# Altium PCB Test.PcbDoc (part 5 of 9)
Units mm, origin at the board's own origin, x right, y up, seen from the top; angles counter-clockwise.
Board outline 152.4 x 101.6 mm, 2 copper layers (Top Layer, Bottom Layer); 1 components, 0 nets, 1713 pads, 1 vias.
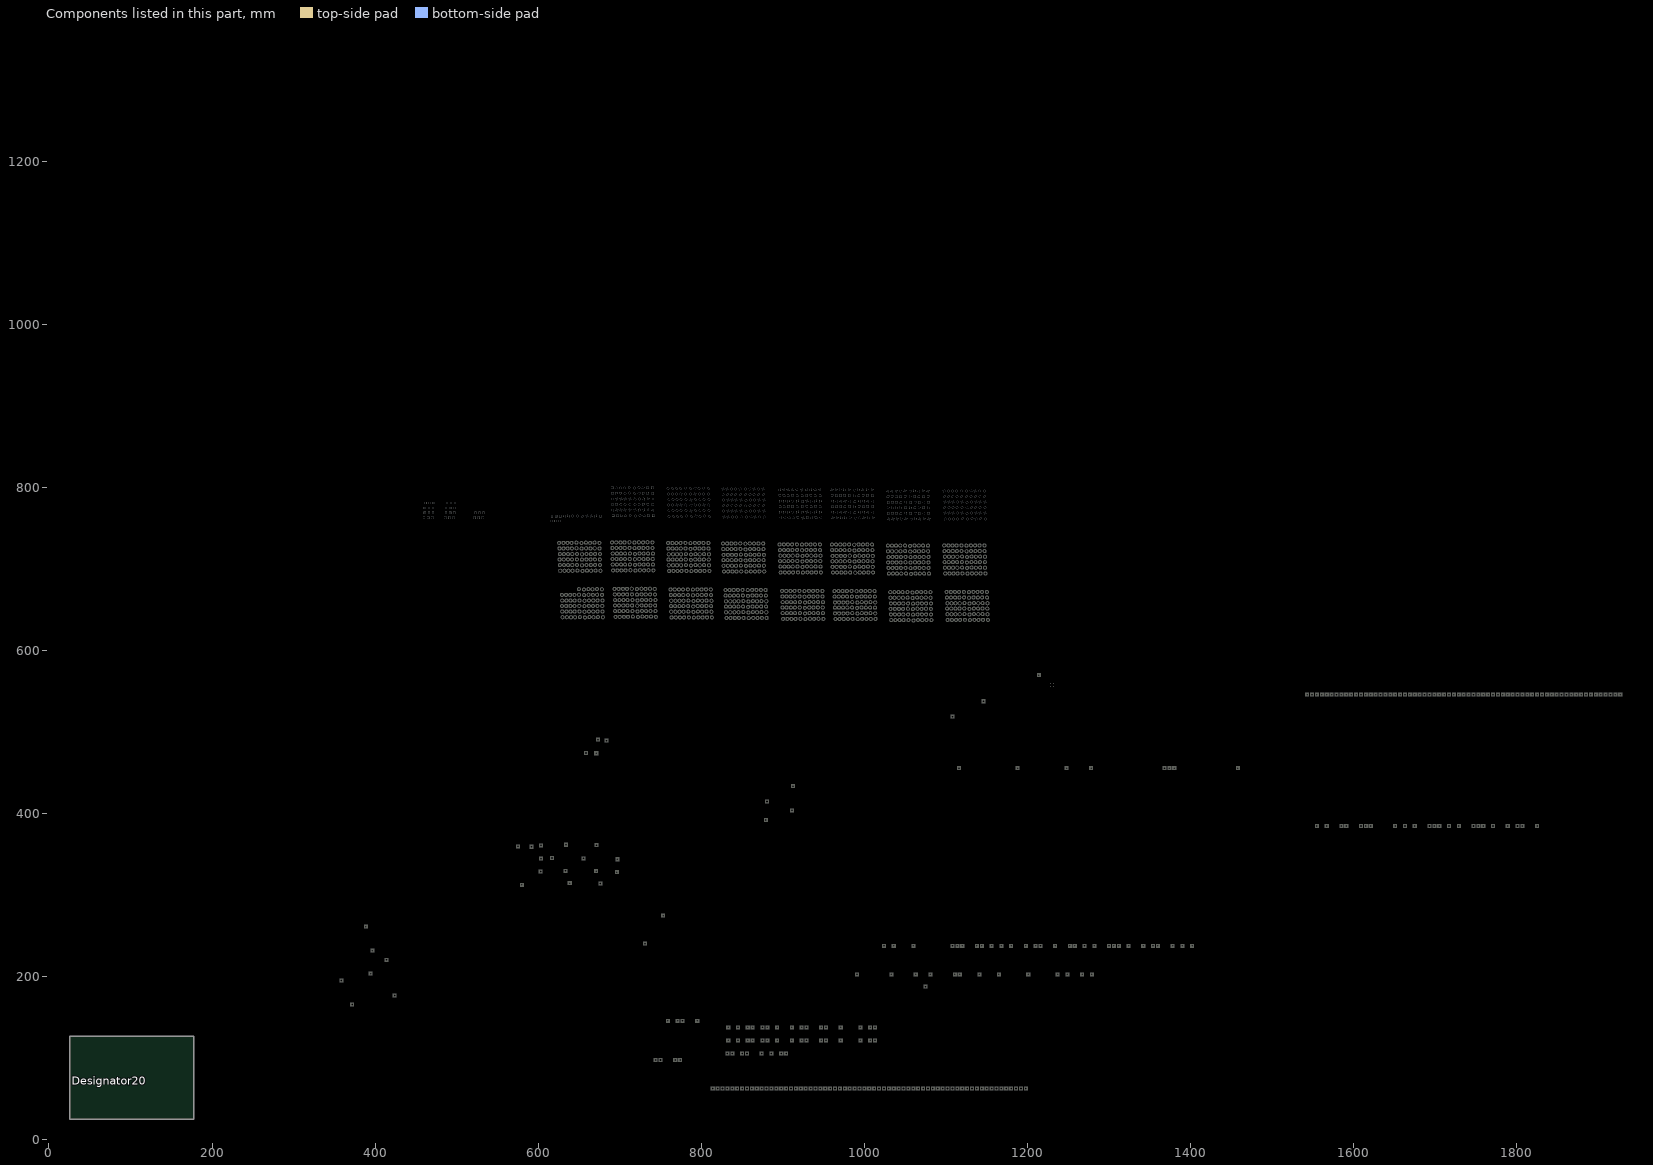
[diagram p5: the components of this part, seen from the top]

## Via types
v1: diameter 0.9, hole 0.4, Top Layer to Bottom Layer, 1 vias

## Nets (pads, with @x,y where several pads share a name; then routed paths per layer and width w, separated by ;. In a path a pad name is that pad's centre, name@x,y a point inside that pad or via, vN(x,y) a via of type N, cw(c..) or ccw(c..) an arc to the next point about the centre after c; other vN are vias at no path point) (continued)
copper on no net: (continued)
  Top Layer w0.25: 524.27,773.73 521.73,773.73 521.73,776.27 524.27,776.27 ; 525.5,773.73 525.5,776.27 ; 624.46,800.56 624.46,798.02 627,798.02 627,800.56 ; 624.569,793.538 624.878,791.017 627.399,791.326 627.09,793.847 ; 624.724,792.277 627.244,792.587 ; 625.222,784.177 625.222,786.717 627.762,786.717 627.762,784.177 ; 625.222,785.447 627.762,785.447 ; 628,676.56 ccw(c628,675.29) 628,674.02 629.46,674.02 ccw(c629.46,675.29) 629.46,676.56 630,676.56 ; 629.339,800.32 629.78,797.819 632.281,798.26 631.84,800.761 ; 629.478,793.275 630.221,790.846 632.65,791.589 631.907,794.018 ; 629.849,792.061 632.279,792.803 ; 630.321,785.227 632.823,785.667 ; 630.542,783.976 630.101,786.477 632.602,786.918 633.043,784.417 ; 630.81,799.07 630.81,799.51 ; 632.871,676.414 ccw(c633.091,675.163) 633.312,673.913 634.749,674.166 ccw(c634.529,675.417) 634.308,676.667 634.84,676.414 ; 634.262,800.049 635.131,797.662 637.518,798.531 636.649,800.918 ; 634.436,792.987 635.589,790.724 637.852,791.877 636.699,794.14 ; 635.012,791.855 637.276,793.009 ; 635.459,785.013 637.845,785.881 ; 635.89,798.856 635.89,799.724 ; 635.893,783.819 635.024,786.206 637.411,787.075 638.28,784.688 ; 639.235,799.755 640.505,797.555 642.705,798.825 641.435,801.025 ; 639.445,792.682 640.974,790.653 643.003,792.182 641.474,794.211 ; 640.21,791.668 642.238,793.196 ; 640.632,784.812 642.832,786.082 ; 640.97,798.655 640.97,799.925 ; 641.267,783.712 639.997,785.912 642.197,787.182 643.467,784.982 ; 645.023,799.573 646.656,797.628 648.601,799.261 646.968,801.206 ; 645.271,792.496 647.129,790.764 648.861,792.622 647.003,794.354 ; 646.2,791.63 647.932,793.488 ; 646.601,784.758 648.547,786.39 ; 646.812,798.601 646.812,800.233 ; 647.417,783.785 645.785,785.731 647.731,787.363 649.363,785.417 ; 651.246,798.88 653.191,797.247 654.824,799.192 652.879,800.825 ; 651.532,791.804 653.663,790.421 655.046,792.552 652.915,793.935 ; 652.597,791.113 653.981,793.243 ; 652.981,784.22 654.613,786.166 ; 653.035,798.063 653.035,800.009 ; 653.953,783.404 652.008,785.037 653.641,786.982 655.586,785.349 ; 656.761,798.952 658.961,797.682 660.231,799.882 658.031,801.152 ; 657.085,791.886 659.423,790.894 660.415,793.232 658.077,794.224 ; 658.254,791.39 659.246,793.728 ; 658.496,798.317 658.496,800.517 ; 658.623,784.474 659.893,786.674 ; 659.723,783.839 657.523,785.109 658.793,787.309 660.993,786.039 ; 662.075,798.531 664.462,797.662 665.331,800.049 662.944,800.918 ; 662.434,791.48 664.909,790.909 665.48,793.384 663.005,793.955 ; 663.671,791.195 664.243,793.669 ; 663.703,798.097 663.703,800.483 ; 664.031,784.254 664.899,786.64 ; 665.224,783.819 662.837,784.688 663.706,787.075 666.093,786.206 ; 667.566,798.387 670.067,797.946 670.508,800.447 668.007,800.888 ; 667.956,791.357 670.493,791.224 670.626,793.761 668.089,793.894 ; 669.037,798.166 669.037,800.668 ; 669.225,791.291 669.357,793.827 ; 669.578,784.323 670.02,786.825 ; 670.829,784.103 668.328,784.544 668.769,787.045 671.27,786.604 ; 673.736,798.02 676.276,798.02 676.276,800.56 673.736,800.56 ; 673.845,793.538 676.366,793.847 676.675,791.326 674.154,791.017 ; 675.006,798.02 675.006,800.56 ; 675.105,793.692 675.415,791.172 ; 675.768,784.177 675.768,786.717 ; 677.038,784.177 674.498,784.177 674.498,786.717 677.038,786.717 ; 807.46,1337.56 807.46,1335.02 810,1335.02 810,1337.56 ; 807.569,1330.538 807.878,1328.017 810.399,1328.326 810.09,1330.847 ; 807.968,1317.113 807.968,1314.573 810.508,1314.573 810.508,1317.113 ; 808.105,1263.604 ccw(c808.259,1262.343) 808.414,1261.082 809.863,1261.261 ; 808.222,1254.177 808.762,1254.177 cw(c808.762,1255.447) 808.762,1256.717 810.222,1256.717 cw(c810.222,1255.447) 810.222,1254.177 ; 808.222,1321.177 808.222,1323.717 810.762,1323.717 810.762,1321.177 ; 808.386,1310.4 808.077,1307.879 810.598,1307.57 810.907,1310.091 ; 808.508,1250.113 ccw(c808.508,1248.843) 808.508,1247.573 809.968,1247.573 ccw(c809.968,1248.843) 809.968,1250.113 810.508,1250.113 ; 808.613,1240.813 cw(c808.767,1242.074) 808.922,1243.335 ; 808.613,1240.814 810.062,1240.636 ccw(c810.217,1241.896) 810.371,1243.157 810.907,1243.334 ; 808.73,1233.73 809.27,1233.73 cw(c809.27,1235) 809.27,1236.27 810.73,1236.27 cw(c810.73,1235) 810.73,1233.73 ; 808.73,1300.73 808.73,1303.27 811.27,1303.27 811.27,1300.73 ; 808.984,1329.277 808.984,1329.587 ; 809.492,1308.83 809.492,1309.14 ; 809.863,1261.26 ccw(c809.709,1262.521) 809.554,1263.782 810.09,1263.603 ; 811,1213.56 ccw(c811,1212.29) 811,1211.02 812.46,1211.02 ccw(c812.46,1212.29) 812.46,1213.56 813,1213.56 ; 811.105,1206.604 ccw(c811.259,1205.343) 811.414,1204.082 812.863,1204.261 ccw(c812.709,1205.521) 812.554,1206.782 813.09,1206.603 ; 811.222,1197.177 811.762,1197.177 cw(c811.762,1198.447) 811.762,1199.717 813.222,1199.717 cw(c813.222,1198.447) 813.222,1197.177 ; 811.508,1193.113 ccw(c811.508,1191.843) 811.508,1190.573 812.968,1190.573 ccw(c812.968,1191.843) 812.968,1193.113 813.508,1193.113 ; 811.73,1176.73 812.27,1176.73 cw(c812.27,1178) 812.27,1179.27 813.73,1179.27 cw(c813.73,1178) 813.73,1176.73 ; 811.922,1186.335 ccw(c811.767,1185.074) 811.613,1183.813 813.062,1183.636 ccw(c813.217,1184.896) 813.371,1186.157 ; 812.339,1337.32 812.78,1334.819 815.281,1335.26 814.84,1337.761 ; 812.478,1330.275 813.221,1327.846 815.65,1328.589 814.907,1331.018 ; 812.871,1270.414 ccw(c813.091,1269.163) 813.312,1267.913 814.749,1268.166 ccw(c814.529,1269.417) 814.308,1270.667 814.84,1270.414 ; 812.995,1263.433 ccw(c813.366,1262.219) 813.737,1261.004 815.133,1261.431 ccw(c814.762,1262.645) 814.391,1263.86 814.907,1263.433 ; 813.08,1268.02 cw(c813.08,1269.29) 813.08,1270.56 ; 813.288,1317.314 812.847,1314.813 815.348,1314.372 815.789,1316.873 ; 813.371,1186.156 813.907,1186.334 ; 813.542,1254.323 814.074,1254.07 cw(c813.853,1255.32) 813.633,1256.571 815.07,1256.824 cw(c815.291,1255.574) 815.511,1254.323 ; 813.542,1320.976 813.101,1323.477 815.602,1323.918 816.043,1321.417 ; 813.609,1233.623 814.141,1233.876 cw(c814.361,1235.127) 814.582,1236.377 816.019,1236.124 cw(c815.799,1234.873) 815.578,1233.623 ; 813.609,1300.97 814.05,1303.471 816.551,1303.03 816.11,1300.529 ; 813.729,1310.571 812.986,1308.142 815.415,1307.399 816.158,1309.828 ; 813.81,1336.07 813.81,1336.51 ; 813.82,1250.22 ccw(c813.599,1248.97) 813.379,1247.719 814.816,1247.466 ccw(c815.037,1248.716) 815.257,1249.967 815.789,1250.22 ; 814.064,1329.061 814.064,1329.803 ; 814.245,1243.413 ccw(c813.874,1242.198) 813.503,1240.984 814.899,1240.557 ccw(c815.27,1241.772) 815.641,1242.986 816.158,1243.413 ; 814.318,1315.623 814.318,1316.063 ; 814.54,1268.02 ccw(c814.54,1269.29) 814.54,1270.56 ; 814.572,1308.614 814.572,1309.356 ; 814.572,1322.227 814.572,1322.667 ; 815.08,1301.78 815.08,1302.22 ; 815.871,1213.414 ccw(c816.091,1212.163) 816.312,1210.913 817.749,1211.166 ccw(c817.529,1212.417) 817.308,1213.667 817.84,1213.414 ; 815.995,1206.433 ccw(c816.366,1205.219) 816.737,1204.004 818.133,1204.431 ccw(c817.762,1205.645) 817.391,1206.86 817.907,1206.433 ; 816.542,1197.323 817.074,1197.07 cw(c816.853,1198.32) 816.633,1199.571 818.07,1199.824 cw(c818.291,1198.574) 818.511,1197.323 ; 816.609,1176.623 817.141,1176.876 cw(c817.361,1178.127) 817.582,1179.377 819.019,1179.124 cw(c818.799,1177.873) 818.578,1176.623 ; 816.82,1193.22 ccw(c816.599,1191.97) 816.379,1190.719 817.816,1190.466 ccw(c818.037,1191.716) 818.257,1192.967 818.789,1193.22 ; 817.245,1186.413 ccw(c816.874,1185.198) 816.503,1183.984 817.899,1183.557 ccw(c818.27,1184.772) 818.641,1185.986 819.158,1186.413 ; 817.262,1337.049 818.131,1334.662 820.518,1335.531 819.649,1337.918 ; 817.436,1329.987 818.589,1327.724 820.852,1328.877 819.699,1331.14 ; 817.77,1270.234 ccw(c818.204,1269.04) 818.638,1267.847 820.01,1268.346 ccw(c819.576,1269.54) 819.142,1270.733 819.649,1270.234 ; 817.917,1263.232 ccw(c818.494,1262.101) 819.07,1260.969 820.371,1261.632 ccw(c819.794,1262.763) 819.218,1263.895 819.699,1263.232 ; 818.532,1233.557 819.04,1234.056 cw(c819.474,1235.25) 819.908,1236.443 821.28,1235.944 cw(c820.846,1234.75) 820.412,1233.557 ; 818.532,1301.241 819.401,1303.628 821.788,1302.759 820.919,1300.372 ; 818.639,1317.471 817.77,1315.084 820.157,1314.215 821.026,1316.602 ; 818.89,1335.856 818.89,1336.724 ; 818.893,1254.503 819.4,1254.004 cw(c818.966,1255.197) 818.532,1256.391 819.904,1256.89 cw(c820.338,1255.697) 820.772,1254.503 ; 818.893,1320.819 818.024,1323.206 820.411,1324.075 821.28,1321.688 ; 819.097,1310.693 817.944,1308.43 820.207,1307.277 821.36,1309.54 ; 819.144,1328.855 819.144,1330.009 ; 819.146,1250.286 ccw(c818.712,1249.093) 818.278,1247.899 819.65,1247.4 ccw(c820.084,1248.593) 820.518,1249.787 821.026,1250.286 ; 819.398,1315.409 819.398,1316.277 ; 819.578,1243.448 ccw(c819.002,1242.316) 818.425,1241.185 819.726,1240.522 ccw(c820.302,1241.654) 820.879,1242.785 821.36,1243.448 ; 819.652,1308.408 819.652,1309.562 ; 819.652,1322.013 819.652,1322.881 ; 820.16,1301.566 820.16,1302.434 ; 820.77,1213.234 ccw(c821.204,1212.04) 821.638,1210.847 823.01,1211.346 ccw(c822.576,1212.54) 822.142,1213.733 822.649,1213.234 ; 820.917,1206.232 ccw(c821.494,1205.101) 822.07,1203.969 823.371,1204.632 ccw(c822.794,1205.763) 822.218,1206.895 822.699,1206.232 ; 821.532,1176.557 822.04,1177.056 cw(c822.474,1178.25) 822.908,1179.443 824.28,1178.944 cw(c823.846,1177.75) 823.412,1176.557 ; 821.893,1197.503 822.4,1197.004 cw(c821.966,1198.197) 821.532,1199.391 822.904,1199.89 cw(c823.338,1198.697) 823.772,1197.503 ; 822.146,1193.286 ccw(c821.712,1192.093) 821.278,1190.899 822.65,1190.4 ccw(c823.084,1191.593) 823.518,1192.787 824.026,1193.286 ; 822.235,1336.755 823.505,1334.555 825.705,1335.825 824.435,1338.025 ; 822.445,1329.682 823.974,1327.653 826.003,1329.182 824.474,1331.211 ; 822.578,1186.448 ccw(c822.002,1185.316) 821.425,1184.185 822.726,1183.522 ccw(c823.302,1184.654) 823.879,1185.785 824.36,1186.448 ; 822.703,1270.025 ccw(c823.338,1268.925) 823.973,1267.825 825.237,1268.555 ccw(c824.602,1269.655) 823.967,1270.755 824.435,1270.025 ; 822.877,1263.007 ccw(c823.641,1261.993) 824.405,1260.978 825.571,1261.857 ccw(c824.807,1262.871) 824.043,1263.886 ; 823.505,1233.535 823.973,1234.265 cw(c824.608,1235.365) 825.243,1236.465 826.507,1235.735 cw(c825.872,1234.635) 825.237,1233.535 ; 823.505,1301.535 824.775,1303.735 826.975,1302.465 825.705,1300.265 ; 823.97,1335.655 823.97,1336.925 ; 824.013,1317.578 822.743,1315.378 824.943,1314.108 826.213,1316.308 ; 824.043,1263.886 824.474,1263.007 ; 824.224,1328.668 824.224,1330.196 ; 824.267,1254.712 824.735,1253.982 cw(c824.1,1255.082) 823.465,1256.182 824.729,1256.912 cw(c825.364,1255.812) 825.999,1254.712 ; 824.267,1320.712 822.997,1322.912 825.197,1324.182 826.467,1321.982 ; 824.478,1315.208 824.478,1316.478 ; 824.481,1250.308 ccw(c823.846,1249.208) 823.211,1248.108 824.475,1247.378 ccw(c825.11,1248.478) 825.745,1249.578 826.213,1250.308 ; 824.482,1310.764 822.953,1308.735 824.982,1307.206 826.511,1309.235 ; 824.551,1240.531 ccw(c825.315,1241.546) 826.079,1242.56 826.511,1243.439 ; 824.551,1240.531 823.385,1241.41 cw(c824.149,1242.424) 824.913,1243.439 ; 824.732,1308.221 824.732,1309.749 ; 824.732,1321.812 824.732,1323.082 ; 825.24,1301.365 825.24,1302.635 ; 825.703,1213.025 ccw(c826.338,1211.925) 826.973,1210.825 828.237,1211.555 ccw(c827.602,1212.655) 826.967,1213.755 827.435,1213.025 ; 825.877,1206.007 ccw(c826.641,1204.993) 827.405,1203.978 828.571,1204.857 ccw(c827.807,1205.871) 827.043,1206.886 827.474,1206.007 ; 826.505,1176.535 826.973,1177.265 cw(c827.608,1178.365) 828.243,1179.465 829.507,1178.735 cw(c828.872,1177.635) 828.237,1176.535 ; 827.267,1197.712 827.735,1196.982 cw(c827.1,1198.082) 826.465,1199.182 827.729,1199.912 cw(c828.364,1198.812) 828.999,1197.712 ; 827.481,1193.308 ccw(c826.846,1192.208) 826.211,1191.108 827.475,1190.378 ccw(c828.11,1191.478) 828.745,1192.578 829.213,1193.308 ; 827.913,1186.439 ccw(c827.149,1185.424) 826.385,1184.41 827.551,1183.531 ccw(c828.315,1184.546) 829.079,1185.56 829.511,1186.439 ; 828.023,1336.573 829.656,1334.628 831.601,1336.261 829.968,1338.206 ; 828.271,1329.496 830.129,1327.764 831.861,1329.622 830.003,1331.354 ; 828.436,1269.921 ccw(c829.253,1268.948) 830.069,1267.975 831.188,1268.913 ccw(c830.371,1269.886) 829.555,1270.859 829.968,1269.921 ; 828.639,1262.891 ccw(c829.568,1262.025) 830.497,1261.159 831.493,1262.227 ccw(c830.564,1263.093) 829.635,1263.959 830.003,1262.891 ; 829.293,1233.685 829.706,1234.623 cw(c830.523,1235.596) 831.339,1236.569 ; 829.293,1301.97 830.925,1303.916 832.871,1302.284 831.239,1300.338 ; 829.812,1335.601 829.812,1337.233 ; 830.066,1328.63 830.066,1330.488 ; 830.164,1317.759 828.531,1315.814 830.476,1314.181 832.109,1316.126 ; 830.317,1257.016 cw(c831.133,1256.043) 831.95,1255.07 ; 830.317,1257.016 829.198,1256.078 ccw(c830.015,1255.105) 830.831,1254.132 830.417,1255.07 ; 830.32,1315.154 830.32,1316.786 ; 830.417,1320.785 828.785,1322.731 830.731,1324.363 832.363,1322.417 ; 830.574,1308.183 830.574,1310.041 ; 830.574,1321.758 830.574,1323.39 ; 830.577,1250.412 ccw(c829.761,1249.439) 828.944,1248.466 830.063,1247.528 ccw(c830.879,1248.501) 831.696,1249.474 ; 830.637,1310.907 828.779,1309.175 830.511,1307.317 832.369,1309.049 ; 830.825,1233.685 ccw(c831.641,1234.658) 832.458,1235.631 831.339,1236.569 ; 831.005,1243.512 ccw(c830.076,1242.646) 829.147,1241.78 830.143,1240.712 ccw(c831.072,1241.578) 832.001,1242.444 832.369,1243.512 ; 831.082,1301.311 831.082,1302.943 ; 831.436,1212.921 ccw(c832.253,1211.948) 833.069,1210.975 834.188,1211.913 ; 831.639,1205.891 ccw(c832.568,1205.025) 833.497,1204.159 834.493,1205.227 ccw(c833.564,1206.093) 832.635,1206.959 833.003,1205.891 ; 831.696,1249.474 832.109,1250.412 ; 831.944,1191.466 cw(c832.761,1192.439) 833.577,1193.412 ; 831.944,1191.466 833.063,1190.528 ccw(c833.879,1191.501) 834.696,1192.474 835.109,1193.412 ; 832.293,1176.685 832.706,1177.623 cw(c833.523,1178.596) 834.339,1179.569 835.458,1178.631 cw(c834.641,1177.658) 833.825,1176.685 ; 832.968,1212.921 832.555,1213.859 cw(c833.371,1212.886) 834.188,1211.913 ; 833.417,1198.07 833.831,1197.132 ; 833.831,1197.132 cw(c833.015,1198.105) 832.198,1199.078 833.317,1200.016 cw(c834.133,1199.043) 834.95,1198.07 ; 834.005,1186.512 ccw(c833.076,1185.646) 832.147,1184.78 833.143,1183.712 ccw(c834.072,1184.578) 835.001,1185.444 835.369,1186.512 ; 834.246,1335.88 836.191,1334.247 837.824,1336.192 835.879,1337.825 ; 834.532,1328.804 836.663,1327.421 838.046,1329.552 835.915,1330.935 ; 834.593,1269.293 ccw(c835.566,1268.477) 836.539,1267.66 837.477,1268.779 ccw(c836.504,1269.595) 835.531,1270.412 835.879,1269.293 ; 834.826,1262.257 ccw(c835.891,1261.566) 836.957,1260.874 837.752,1262.099 ccw(c836.687,1262.79) 835.621,1263.482 835.915,1262.257 ; 835.516,1233.37 835.863,1234.489 cw(c836.836,1235.305) 837.809,1236.122 838.747,1235.003 cw(c837.774,1234.187) 836.801,1233.37 ; 835.516,1301.902 837.461,1303.535 839.094,1301.59 837.149,1299.957 ; 836.035,1335.063 836.035,1337.009 ; 836.289,1328.113 836.289,1330.243 ; 836.543,1314.616 836.543,1316.562 ; 836.699,1317.378 834.754,1315.745 836.387,1313.8 838.332,1315.433 ; 836.797,1307.666 836.797,1309.796 ; 836.797,1321.22 836.797,1323.166 ; 836.953,1254.936 837.301,1253.817 cw(c836.328,1254.634) 835.355,1255.45 836.293,1256.569 cw(c837.266,1255.752) 838.239,1254.936 ; 836.953,1320.404 835.008,1322.037 836.641,1323.982 838.586,1322.349 ; 837.047,1249.965 ccw(c836.074,1249.148) 835.101,1248.332 836.039,1247.213 ccw(c837.012,1248.03) 837.985,1248.846 838.332,1249.965 ; 837.171,1310.488 835.04,1309.105 836.423,1306.974 838.554,1308.357 ; 837.305,1300.773 837.305,1302.719 ; 837.465,1243.035 ccw(c836.399,1242.343) 835.334,1241.652 836.129,1240.427 ccw(c837.195,1241.119) 838.26,1241.81 838.554,1243.035 ; 837.593,1212.293 ccw(c838.566,1211.477) 839.539,1210.66 840.477,1211.779 ccw(c839.504,1212.595) 838.531,1213.412 838.879,1212.293 ; 837.826,1205.257 ccw(c838.891,1204.566) 839.957,1203.874 840.752,1205.099 ccw(c839.687,1205.79) 838.621,1206.482 838.915,1205.257 ; 838.516,1176.37 838.863,1177.489 cw(c839.836,1178.305) 840.809,1179.122 841.747,1178.003 cw(c840.774,1177.187) 839.801,1176.37 ; 839.761,1335.952 841.961,1334.682 843.231,1336.882 841.031,1338.152 ; 839.953,1197.936 840.301,1196.817 cw(c839.328,1197.634) 838.355,1198.45 839.293,1199.569 cw(c840.266,1198.752) 841.239,1197.936 ; 840.031,1269.42 ccw(c841.131,1268.785) 842.231,1268.15 842.961,1269.414 ccw(c841.861,1270.049) 840.761,1270.684 841.031,1269.42 ; 840.047,1192.965 ccw(c839.074,1192.148) 838.101,1191.332 839.039,1190.213 ccw(c840.012,1191.03) 840.985,1191.846 841.332,1192.965 ; 840.085,1328.886 842.423,1327.894 843.415,1330.232 841.077,1331.224 ; 840.296,1262.383 ccw(c841.465,1261.887) 842.634,1261.391 843.204,1262.735 ccw(c842.035,1263.231) 840.866,1263.727 841.077,1262.383 ; 840.465,1186.035 ccw(c839.399,1185.343) 838.334,1184.652 839.129,1183.427 ccw(c840.195,1184.119) 841.26,1184.81 841.554,1186.035 ; 841.031,1233.86 841.301,1235.124 cw(c842.401,1235.759) 843.501,1236.394 844.231,1235.13 cw(c843.131,1234.495) 842.031,1233.86 ; 841.031,1302.592 843.231,1303.862 844.501,1301.662 842.301,1300.392 ; 841.496,1335.317 841.496,1337.517 ; 841.75,1328.39 841.75,1330.728 ; 842.004,1314.87 842.004,1317.07 ; 842.258,1307.943 842.258,1310.281 ; 842.258,1321.474 842.258,1323.674 ; 842.469,1317.705 840.269,1316.435 841.539,1314.235 843.739,1315.505 ; 842.723,1255.571 842.993,1254.307 cw(c841.893,1254.942) 840.793,1255.577 841.523,1256.841 cw(c842.623,1256.206) 843.723,1255.571 ; 842.723,1320.839 840.523,1322.109 841.793,1324.309 843.993,1323.039 ; 842.739,1250.237 ccw(c841.639,1249.602) 840.539,1248.967 841.269,1247.703 ccw(c842.369,1248.338) 843.469,1248.973 843.739,1250.237 ; 842.766,1301.027 842.766,1303.227 ; 842.931,1310.777 840.593,1309.785 841.585,1307.447 843.923,1308.439 ; 843.031,1212.42 ccw(c844.131,1211.785) 845.231,1211.15 845.961,1212.414 ccw(c844.861,1213.049) 843.761,1213.684 844.031,1212.42 ; 843.142,1243.28 ccw(c841.973,1242.784) 840.804,1242.288 841.374,1240.944 ccw(c842.543,1241.44) 843.712,1241.936 843.923,1243.28 ; 843.296,1205.383 ccw(c844.465,1204.887) 845.634,1204.391 846.204,1205.735 ccw(c845.035,1206.231) 843.866,1206.727 844.077,1205.383 ; 844.031,1176.86 844.301,1178.124 cw(c845.401,1178.759) 846.501,1179.394 847.231,1178.13 cw(c846.131,1177.495) 845.031,1176.86 ; 845.075,1335.531 847.462,1334.662 848.331,1337.049 845.944,1337.918 ; 845.26,1269.038 ccw(c846.453,1268.604) 847.647,1268.17 848.146,1269.542 ccw(c846.953,1269.976) 845.759,1270.41 845.944,1269.038 ; 845.434,1328.48 847.909,1327.909 848.48,1330.384 846.005,1330.955 ; 845.555,1262.006 ccw(c846.793,1261.721) 848.03,1261.435 848.359,1262.858 ccw(c847.121,1263.143) 845.884,1263.429 846.005,1262.006 ; 845.723,1198.571 845.993,1197.307 cw(c844.893,1197.942) 843.793,1198.577 844.523,1199.841 cw(c845.623,1199.206) 846.723,1198.571 ; 845.739,1193.237 ccw(c844.639,1192.602) 843.539,1191.967 844.269,1190.703 ccw(c845.369,1191.338) 846.469,1191.973 846.739,1193.237 ; 846.142,1186.28 ccw(c844.973,1185.784) 843.804,1185.288 844.374,1183.944 ccw(c845.543,1184.44) 846.712,1184.936 846.923,1186.28 ; 846.345,1233.88 846.53,1235.252 cw(c847.723,1235.686) 848.917,1236.12 849.416,1234.748 cw(c848.223,1234.314) 847.029,1233.88 ; 846.345,1302.759 848.732,1303.628 849.601,1301.241 847.214,1300.372 ; 846.703,1335.097 846.703,1337.483 ; 846.957,1328.195 846.957,1330.669 ; 847.211,1314.65 847.211,1317.036 ; 847.465,1307.748 847.465,1310.222 ; 847.465,1321.254 847.465,1323.64 ; 847.97,1317.471 845.583,1316.602 846.452,1314.215 848.839,1315.084 ; 847.973,1300.807 847.973,1303.193 ; 848.155,1249.963 ccw(c846.961,1249.529) 845.768,1249.095 846.267,1247.723 ccw(c847.461,1248.157) 848.654,1248.591 848.839,1249.963 ; 848.224,1255.699 848.409,1254.327 cw(c847.215,1254.761) 846.022,1255.195 846.521,1256.567 cw(c847.715,1256.133) 848.908,1255.699 ; 848.224,1320.819 845.837,1321.688 846.706,1324.075 849.093,1323.206 ; 848.26,1212.038 ccw(c849.453,1211.604) 850.647,1211.17 851.146,1212.542 ccw(c849.953,1212.976) 848.759,1213.41 848.944,1212.038 ; 848.417,1310.508 845.942,1309.937 846.513,1307.462 848.988,1308.033 ; 848.538,1242.982 ccw(c847.301,1242.696) 846.063,1242.411 846.392,1240.988 ccw(c847.629,1241.274) 848.867,1241.559 848.988,1242.982 ; 848.555,1205.006 ccw(c849.793,1204.721) 851.03,1204.435 851.359,1205.858 ccw(c850.121,1206.143) 848.884,1206.429 849.005,1205.006 ; 849.345,1176.88 849.53,1178.252 cw(c850.723,1178.686) 851.917,1179.12 852.416,1177.748 cw(c851.223,1177.314) 850.029,1176.88 ; 850.566,1335.387 853.067,1334.946 853.508,1337.447 851.007,1337.888 ; 850.659,1268.919 ccw(c851.91,1268.698) 853.161,1268.478 853.414,1269.915 ccw(c852.164,1270.136) 850.913,1270.356 851.007,1268.919 ; 850.956,1328.357 853.493,1328.224 853.626,1330.761 851.089,1330.894 ; 850.985,1261.896 ccw(c852.253,1261.83) 853.521,1261.764 853.597,1263.222 ccw(c852.329,1263.288) 851.061,1263.354 851.089,1261.896 ; 851.155,1192.963 ccw(c849.961,1192.529) 848.768,1192.095 849.267,1190.723 ccw(c850.461,1191.157) 851.654,1191.591 851.839,1192.963 ; 851.224,1198.699 851.409,1197.327 cw(c850.215,1197.761) 849.022,1198.195 849.521,1199.567 cw(c850.715,1199.133) 851.908,1198.699 ; 851.538,1185.982 ccw(c850.301,1185.696) 849.063,1185.411 849.392,1183.988 ccw(c850.629,1184.274) 851.867,1184.559 851.988,1185.982 ; 851.836,1234.187 851.93,1235.625 cw(c853.18,1235.846) 854.431,1236.066 854.684,1234.629 cw(c853.434,1234.408) 852.183,1234.188 ; 851.836,1303.157 854.337,1303.598 854.778,1301.097 852.277,1300.656 ; 852.037,1335.166 852.037,1337.668 ; 852.291,1328.291 852.291,1330.827 ; 852.545,1314.719 852.545,1317.221 ; 852.799,1307.844 852.799,1310.38 ; 852.799,1321.323 852.799,1323.825 ; 853.307,1300.876 853.307,1303.378 ; 853.575,1317.441 851.074,1317 851.515,1314.499 854.016,1314.94 ; 853.659,1211.919 ccw(c854.91,1211.698) 856.161,1211.478 856.414,1212.915 ccw(c855.164,1213.136) 853.913,1213.356 854.007,1211.919 ; 853.669,1249.909 ccw(c852.418,1249.689) 851.167,1249.468 851.421,1248.03 ccw(c852.672,1248.251) 853.923,1248.472 854.016,1249.91 ; 853.829,1256.072 853.923,1254.634 cw(c852.672,1254.855) 851.421,1255.076 851.675,1256.514 cw(c852.926,1256.293) 854.177,1256.072 ; 853.829,1321.103 851.328,1321.544 851.769,1324.045 854.27,1323.604 ; 853.985,1204.896 ccw(c855.253,1204.83) 856.521,1204.764 856.597,1206.222 ccw(c855.329,1206.288) 854.061,1206.354 854.089,1204.896 ; 854.001,1310.447 851.464,1310.314 851.597,1307.777 854.134,1307.91 ; 854.029,1242.907 ccw(c852.761,1242.841) 851.493,1242.775 851.569,1241.317 ccw(c852.837,1241.383) 854.105,1241.449 854.134,1242.907 ; 854.836,1177.187 854.93,1178.625 cw(c856.18,1178.846) 857.431,1179.066 857.684,1177.629 cw(c856.434,1177.408) 855.183,1177.188 ; 856.669,1192.909 ccw(c855.418,1192.689) 854.167,1192.468 854.421,1191.03 ccw(c855.672,1191.251) 856.923,1191.472 857.016,1192.91 ; 856.736,1335.02 859.276,1335.02 859.276,1337.56 856.736,1337.56 ; 856.829,1199.072 856.923,1197.634 cw(c855.672,1197.855) 854.421,1198.076 854.675,1199.514 cw(c855.926,1199.293) 857.177,1199.072 ; 856.845,1261.553 856.911,1263.002 cw(c858.171,1263.157) 859.432,1263.311 859.609,1261.862 cw(c858.349,1261.707) 857.088,1261.553 ; 856.845,1330.538 859.366,1330.847 859.675,1328.326 857.154,1328.017 ; 857.029,1185.907 ccw(c855.761,1185.841) 854.493,1185.775 854.569,1184.317 ccw(c855.837,1184.383) 857.105,1184.449 857.134,1185.907 ; 858.006,1300.73 860.546,1300.73 860.546,1303.27 858.006,1303.27 ; 858.006,1335.02 858.006,1337.56 ; 858.26,1328.172 858.26,1330.692 ; 858.514,1314.573 858.514,1317.113 ; 858.768,1307.725 858.768,1310.245 ; 858.768,1321.177 858.768,1323.717 ; 859.276,1300.73 859.276,1303.27 ; 859.784,1314.573 857.244,1314.573 857.244,1317.113 859.784,1317.113 ; 859.845,1204.553 859.911,1206.002 cw(c861.171,1206.157) 862.432,1206.311 862.609,1204.862 cw(c861.349,1204.707) 860.088,1204.553 ; 859.874,1242.555 859.939,1241.106 cw(c858.679,1241.26) 857.418,1241.415 857.597,1242.864 cw(c858.857,1242.71) 860.118,1242.555 ; 859.874,1307.57 857.353,1307.879 857.662,1310.4 860.183,1310.091 ; 860.038,1321.177 857.498,1321.177 857.498,1323.717 860.038,1323.717 ; 862.874,1185.555 862.939,1184.106 cw(c861.679,1184.26) 860.418,1184.415 860.597,1185.864 cw(c861.857,1185.71) 863.118,1185.555 ; 872.342,1330.865 872.956,1328.401 875.42,1329.015 874.806,1331.479 ; 872.357,1338.068 872.357,1335.528 874.897,1335.528 874.897,1338.068 ; 872.865,1317.621 872.865,1315.081 875.405,1315.081 875.405,1317.621 ; 872.865,1263.996 ccw(c873.173,1262.763) 873.48,1261.531 874.897,1261.884 ccw(c874.589,1263.117) 874.282,1264.349 874.806,1263.996 ; 872.897,1271.068 ccw(c872.897,1269.798) 872.897,1268.528 874.357,1268.528 ccw(c874.357,1269.798) 874.357,1271.068 874.897,1271.068 ; 873.119,1324.225 873.119,1321.685 875.659,1321.685 875.659,1324.225 ; 873.405,1250.621 ccw(c873.405,1249.351) 873.405,1248.081 874.865,1248.081 ccw(c874.865,1249.351) 874.865,1250.621 875.405,1250.621 ; 873.464,1311.032 872.85,1308.568 875.314,1307.954 875.928,1310.418 ; 873.627,1303.778 873.627,1301.238 876.167,1301.238 876.167,1303.778 ; 873.659,1257.225 ccw(c873.659,1255.955) 873.659,1254.685 875.119,1254.685 ccw(c875.119,1255.955) 875.119,1257.225 875.659,1257.225 ; 873.881,1329.633 873.881,1330.247 ; 873.988,1243.902 ccw(c873.681,1242.67) 873.373,1241.437 874.79,1241.084 ccw(c875.097,1242.316) 875.405,1243.549 875.928,1243.902 ; 874.167,1236.778 ccw(c874.167,1235.508) 874.167,1234.238 875.627,1234.238 ccw(c875.627,1235.508) 875.627,1236.778 876.167,1236.778 ; 874.389,1309.186 874.389,1309.8 ; 875.865,1206.996 ccw(c876.173,1205.763) 876.48,1204.531 877.897,1204.884 ccw(c877.589,1206.117) 877.282,1207.349 877.806,1206.996 ; 875.897,1214.068 ccw(c875.897,1212.798) 875.897,1211.528 877.357,1211.528 ccw(c877.357,1212.798) 877.357,1214.068 877.897,1214.068 ; 876.405,1193.621 ccw(c876.405,1192.351) 876.405,1191.081 877.865,1191.081 ccw(c877.865,1192.351) 877.865,1193.621 878.405,1193.621 ; 876.659,1200.225 ccw(c876.659,1198.955) 876.659,1197.685 878.119,1197.685 ccw(c878.119,1198.955) 878.119,1200.225 878.659,1200.225 ; 876.988,1186.902 ccw(c876.681,1185.67) 876.373,1184.437 877.79,1184.084 ccw(c878.097,1185.316) 878.405,1186.549 878.928,1186.902 ; 877.079,1337.557 877.948,1335.17 880.335,1336.039 879.466,1338.426 ; 877.167,1179.778 ccw(c877.167,1178.508) 877.167,1177.238 878.627,1177.238 ccw(c878.627,1178.508) 878.627,1179.778 879.167,1179.778 ; 877.198,1330.283 878.618,1328.177 880.724,1329.597 879.304,1331.703 ; 877.587,1270.742 ccw(c878.021,1269.548) 878.455,1268.355 879.827,1268.854 ccw(c879.393,1270.048) 878.959,1271.241 879.466,1270.742 ; 877.646,1263.585 ccw(c878.356,1262.532) 879.066,1261.479 ; 877.841,1323.714 878.71,1321.327 881.097,1322.196 880.228,1324.583 ; 878.349,1256.899 ccw(c878.783,1255.705) 879.217,1254.512 880.589,1255.011 ccw(c880.155,1256.205) 879.721,1257.398 880.228,1256.899 ; 878.456,1317.979 877.587,1315.592 879.974,1314.723 880.843,1317.11 ; 878.707,1336.364 878.707,1337.232 ; 878.961,1329.23 878.961,1330.65 ; 878.963,1250.794 ccw(c878.529,1249.601) 878.095,1248.407 879.467,1247.908 ccw(c879.901,1249.101) 880.335,1250.295 880.843,1250.794 ; 879.066,1261.479 880.276,1262.295 ccw(c879.566,1263.348) 878.856,1264.401 879.304,1263.585 ; 879.126,1311.256 877.706,1309.15 879.812,1307.73 881.232,1309.836 ; 879.215,1315.917 879.215,1316.785 ; 879.218,1304.136 878.349,1301.749 880.736,1300.88 881.605,1303.267 ; 879.364,1241.032 ccw(c880.074,1242.085) 880.784,1243.138 881.232,1243.954 ; 879.364,1241.032 878.154,1241.848 cw(c878.864,1242.901) 879.574,1243.954 ; 879.469,1308.783 879.469,1310.203 ; 879.469,1322.521 879.469,1323.389 ; 879.725,1236.951 ccw(c879.291,1235.758) 878.857,1234.564 880.229,1234.065 ccw(c880.663,1235.258) 881.097,1236.452 881.605,1236.951 ; 879.977,1302.074 879.977,1302.942 ; 880.587,1213.742 ccw(c881.021,1212.548) 881.455,1211.355 882.827,1211.854 ccw(c882.393,1213.048) 881.959,1214.241 882.466,1213.742 ; 880.646,1206.585 ccw(c881.356,1205.532) 882.066,1204.479 883.276,1205.295 ccw(c882.566,1206.348) 881.856,1207.401 ; 881.349,1199.899 ccw(c881.783,1198.705) 882.217,1197.512 883.589,1198.011 ccw(c883.155,1199.205) 882.721,1200.398 883.228,1199.899 ; 881.856,1207.401 882.304,1206.585 ; 881.963,1193.794 ccw(c881.529,1192.601) 881.095,1191.407 882.467,1190.908 ccw(c882.901,1192.101) 883.335,1193.295 883.843,1193.794 ; 881.998,1336.954 883.631,1335.009 885.576,1336.642 883.943,1338.587 ; 882.267,1329.659 884.322,1328.166 885.815,1330.221 883.76,1331.714 ; 882.411,1270.302 ccw(c883.228,1269.329) 884.044,1268.356 885.163,1269.294 ccw(c884.346,1270.267) 883.53,1271.24 883.943,1270.302 ; 882.574,1186.954 ccw(c881.864,1185.901) 881.154,1184.848 882.364,1184.032 ccw(c883.074,1185.085) 883.784,1186.138 884.232,1186.954 ; 882.584,1263.096 ccw(c883.612,1262.349) 884.639,1261.603 885.498,1262.784 ccw(c884.47,1263.531) 883.443,1264.277 883.76,1263.096 ; 882.725,1179.951 ccw(c882.291,1178.758) 881.857,1177.564 883.229,1177.065 ccw(c883.663,1178.258) 884.097,1179.452 884.605,1179.951 ; 883.787,1335.982 883.787,1337.614 ; 883.79,1324.583 882.921,1322.196 885.308,1321.327 886.177,1323.714 ; 884.041,1328.913 884.041,1330.967 ; 884.139,1318.14 882.506,1316.195 884.451,1314.562 886.084,1316.507 ; 884.295,1315.535 884.295,1317.167 ; 884.297,1257.398 ccw(c883.863,1256.205) 883.429,1255.011 884.801,1254.512 ccw(c885.235,1255.705) 885.669,1256.899 ; 884.549,1308.466 884.549,1310.52 ; 884.549,1322.521 884.549,1323.389 ; 884.552,1250.793 ccw(c883.736,1249.82) 882.919,1248.847 884.038,1247.909 ccw(c884.854,1248.882) 885.671,1249.855 ; 884.83,1311.267 882.775,1309.774 884.268,1307.719 886.323,1309.212 ; 884.9,1304.297 883.268,1302.351 885.214,1300.719 886.846,1302.665 ; 885.057,1301.692 885.057,1303.324 ; 885.147,1243.83 ccw(c884.12,1243.084) 883.092,1242.337 883.951,1241.156 ccw(c884.978,1241.902) 886.006,1242.649 886.323,1243.83 ; 885.314,1236.95 ccw(c884.498,1235.977) 883.681,1235.004 884.8,1234.066 ccw(c885.616,1235.039) 886.433,1236.012 886.846,1236.95 ; 885.411,1213.302 ccw(c886.228,1212.329) 887.044,1211.356 888.163,1212.294 ; 885.584,1206.096 ccw(c886.612,1205.349) 887.639,1204.603 888.498,1205.784 ccw(c887.47,1206.531) 886.443,1207.277 886.76,1206.096 ; 885.671,1249.855 886.084,1250.793 ; 885.669,1256.899 886.177,1257.398 ; 885.919,1191.847 cw(c886.736,1192.82) 887.552,1193.793 ; 885.919,1191.847 887.038,1190.909 ccw(c887.854,1191.882) 888.671,1192.855 889.084,1193.793 ; 886.943,1213.302 886.53,1214.24 cw(c887.346,1213.267) 888.163,1212.294 ; 887.132,1336.333 889.332,1335.063 890.602,1337.263 888.402,1338.533 ; 887.297,1200.398 ccw(c886.863,1199.205) 886.429,1198.011 887.801,1197.512 ccw(c888.235,1198.705) 888.669,1199.899 889.177,1200.398 ; 887.402,1269.801 ccw(c888.502,1269.166) 889.602,1268.531 890.332,1269.795 ccw(c889.232,1270.43) 888.132,1271.065 888.402,1269.801 ; 887.55,1329.069 889.992,1328.369 890.692,1330.811 888.25,1331.511 ; 887.699,1262.588 ccw(c888.92,1262.238) 890.141,1261.888 890.543,1263.292 ccw(c889.322,1263.642) 888.101,1263.992 888.25,1262.588 ; 887.8,1177.066 886.681,1178.004 cw(c887.498,1178.977) 888.314,1179.95 ; 887.8,1177.066 ccw(c888.616,1178.039) 889.433,1179.012 889.846,1179.95 ; 887.894,1322.49 890.094,1321.22 891.364,1323.42 889.164,1324.69 ; 888.147,1186.83 ccw(c887.12,1186.084) 886.092,1185.337 886.951,1184.156 ccw(c887.978,1184.902) 889.006,1185.649 889.323,1186.83 ; 888.164,1255.958 ccw(c889.264,1255.323) 890.364,1254.688 891.094,1255.952 ccw(c889.994,1256.587) 888.894,1257.222 889.164,1255.958 ; 888.867,1335.698 888.867,1337.898 ; 889.121,1328.719 889.121,1331.161 ; 889.375,1315.251 889.375,1317.451 ; 889.629,1308.272 889.629,1310.714 ; 889.629,1321.855 889.629,1324.055 ; 889.84,1318.086 887.64,1316.816 888.91,1314.616 891.11,1315.886 ; 890.11,1250.618 ccw(c889.01,1249.983) 887.91,1249.348 888.64,1248.084 ccw(c889.74,1248.719) 890.84,1249.354 891.11,1250.618 ; 890.137,1301.408 890.137,1303.608 ; 890.402,1212.801 ccw(c891.502,1212.166) 892.602,1211.531 893.332,1212.795 ccw(c892.232,1213.43) 891.132,1214.065 891.402,1212.801 ; 890.5,1311.064 888.058,1310.364 888.758,1307.922 891.2,1308.622 ; 890.602,1304.243 888.402,1302.973 889.672,1300.773 891.872,1302.043 ; 890.649,1243.545 ccw(c889.428,1243.195) 888.207,1242.845 888.609,1241.441 ccw(c889.83,1241.791) 891.051,1242.141 891.2,1243.545 ; 890.699,1205.588 ccw(c891.92,1205.238) 893.141,1204.888 893.543,1206.292 ccw(c892.322,1206.642) 891.101,1206.992 891.25,1205.588 ; 890.872,1236.775 ccw(c889.772,1236.14) 888.672,1235.505 889.402,1234.241 ccw(c890.502,1234.876) 891.602,1235.511 891.872,1236.775 ; 891.164,1198.958 ccw(c892.264,1198.323) 893.364,1197.688 894.094,1198.952 ccw(c892.994,1199.587) 891.894,1200.222 892.164,1198.958 ; 893.11,1193.618 ccw(c892.01,1192.983) 890.91,1192.348 891.64,1191.084 ccw(c892.74,1191.719) 893.84,1192.354 894.11,1193.618 ; 893.238,1335.895 895.739,1335.454 896.18,1337.955 893.679,1338.396 ; 893.331,1269.427 ccw(c894.582,1269.206) 895.833,1268.986 896.086,1270.423 ccw(c894.836,1270.644) 893.585,1270.864 893.679,1269.427 ; 893.607,1262.25 893.645,1263.707 cw(c894.912,1263.795) 896.179,1263.884 896.281,1262.427 cw(c895.014,1262.339) 893.747,1262.25 ; 893.607,1331.245 896.141,1331.423 896.319,1328.889 893.785,1328.711 ; 893.649,1186.545 ccw(c892.428,1186.195) 891.207,1185.845 891.609,1184.441 ccw(c892.83,1184.791) 894.051,1185.141 894.2,1186.545 ; 893.872,1179.775 ccw(c892.772,1179.14) 891.672,1178.505 892.402,1177.241 ccw(c893.502,1177.876) 894.602,1178.511 894.872,1179.775 ; 894,1322.052 896.501,1321.611 896.942,1324.112 894.441,1324.553 ; 894.093,1255.584 ccw(c895.344,1255.363) 896.595,1255.143 896.848,1256.58 ccw(c895.598,1256.801) 894.347,1257.021 894.441,1255.584 ; 894.709,1335.674 894.709,1338.176 ; 894.963,1328.8 894.963,1331.334 ; 895.217,1315.227 895.217,1317.729 ; 895.471,1308.353 895.471,1310.887 ; 895.471,1321.831 895.471,1324.333 ; 895.979,1301.384 895.979,1303.886 ; 896.247,1317.949 893.746,1317.508 894.187,1315.007 896.688,1315.448 ; 896.331,1212.427 ccw(c897.582,1212.206) 898.833,1211.986 899.086,1213.423 ccw(c897.836,1213.644) 896.585,1213.864 896.679,1212.427 ; 896.341,1250.417 ccw(c895.09,1250.197) 893.839,1249.976 894.093,1248.538 ccw(c895.344,1248.759) 896.595,1248.98 896.688,1250.418 ; 896.607,1205.25 896.645,1206.707 cw(c897.912,1206.795) 899.179,1206.884 899.281,1205.427 cw(c898.014,1205.339) 896.747,1205.25 ; 896.649,1243.26 896.687,1241.803 cw(c895.42,1241.892) 894.153,1241.98 894.255,1243.437 cw(c895.522,1243.348) 896.789,1243.26 ; 896.649,1308.264 894.115,1308.442 894.293,1310.976 896.827,1310.798 ; 897.009,1304.106 894.508,1303.665 894.949,1301.164 897.45,1301.605 ; 897.093,1198.584 ccw(c898.344,1198.363) 899.595,1198.143 899.848,1199.58 ccw(c898.598,1199.801) 897.347,1200.021 897.441,1198.584 ; 897.103,1236.574 ccw(c895.852,1236.354) 894.601,1236.133 894.855,1234.695 ccw(c896.106,1234.916) 897.357,1235.137 897.45,1236.575 ; 899.341,1193.417 ccw(c898.09,1193.197) 896.839,1192.976 897.093,1191.538 ccw(c898.344,1191.759) 899.595,1191.98 899.688,1193.418 ; 899.461,1268.605 899.555,1270.042 cw(c900.805,1270.263) 902.056,1270.483 902.309,1269.046 ; 899.461,1337.574 901.962,1338.015 902.403,1335.514 899.902,1335.073 ; 899.509,1261.503 899.729,1262.836 cw(c900.889,1263.353) 902.049,1263.869 902.643,1262.536 cw(c901.483,1262.019) 900.323,1261.503 ; 899.509,1330.33 901.83,1331.363 902.863,1329.042 900.542,1328.009 ; 899.649,1186.26 899.687,1184.803 cw(c898.42,1184.892) 897.153,1184.98 897.255,1186.437 cw(c898.522,1186.348) 899.789,1186.26 ; 899.808,1268.605 ccw(c901.059,1268.825) 902.309,1269.046 ; 900.063,1248.599 900.316,1250.036 cw(c901.567,1249.816) 902.817,1249.595 ; 900.063,1248.599 ccw(c901.313,1248.378) 902.564,1248.158 902.47,1249.595 ; 900.103,1179.574 ccw(c898.852,1179.354) 897.601,1179.133 897.855,1177.695 ccw(c899.106,1177.916) 900.357,1178.137 900.45,1179.575 ; 900.223,1254.762 900.317,1256.199 cw(c901.567,1256.42) 902.818,1256.64 903.071,1255.203 ; 900.223,1323.731 902.724,1324.172 903.165,1321.671 900.664,1321.23 ; 900.57,1254.762 ccw(c901.821,1254.982) 903.071,1255.203 ; 900.825,1234.756 901.078,1236.193 cw(c902.329,1235.973) 903.579,1235.752 ; 900.825,1234.756 ccw(c902.075,1234.535) 903.326,1234.315 903.232,1235.752 ; 900.932,1335.293 900.932,1337.795 ; 901.186,1328.526 901.186,1330.846 ; 901.44,1314.846 901.44,1317.348 ; 901.694,1308.079 901.694,1310.399 ; 901.694,1321.45 901.694,1323.952 ; 902.202,1301.003 902.202,1303.505 ; 902.338,1242.389 902.557,1241.056 cw(c901.397,1241.572) 900.237,1242.089 900.831,1243.422 cw(c901.991,1242.906) 903.151,1242.389 ; 902.338,1307.562 900.017,1308.595 901.05,1310.916 903.371,1309.883 ; 902.461,1211.605 902.555,1213.042 ; 902.47,1314.626 899.969,1315.067 900.41,1317.568 902.911,1317.127 ; 902.509,1204.503 902.729,1205.836 cw(c903.889,1206.353) 905.049,1206.869 905.643,1205.536 cw(c904.483,1205.019) 903.323,1204.503 ; 902.555,1213.042 cw(c903.805,1213.263) 905.056,1213.483 ; 902.808,1211.605 ccw(c904.059,1211.825) 905.309,1212.046 905.056,1213.483 ; 903.223,1197.762 903.317,1199.199 ; 903.232,1300.783 900.731,1301.224 901.172,1303.725 903.673,1303.284 ; 903.317,1199.199 cw(c904.567,1199.42) 905.818,1199.64 ; 903.57,1197.762 ccw(c904.821,1197.982) 906.071,1198.203 905.818,1199.64 ; 904.658,1268.658 904.928,1269.922 cw(c906.028,1270.557) 907.128,1271.192 907.858,1269.928 cw(c906.758,1269.293) 905.658,1268.658 ; 904.658,1337.39 906.858,1338.66 908.128,1336.46 905.928,1335.19 ; 904.851,1261.66 905.226,1262.71 cw(c906.14,1263.592) 907.053,1264.474 908.068,1263.424 cw(c907.154,1262.542) 906.241,1261.66 ; 904.851,1330.098 906.678,1331.863 908.443,1330.036 906.616,1328.271 ; 905.338,1185.389 905.557,1184.056 cw(c904.397,1184.572) 903.237,1185.089 903.831,1186.422 cw(c904.991,1185.906) 906.151,1185.389 ; 905.42,1254.815 905.69,1256.079 cw(c906.79,1256.714) 907.89,1257.349 908.62,1256.085 cw(c907.52,1255.45) 906.42,1254.815 ; 905.42,1323.547 907.62,1324.817 908.89,1322.617 906.69,1321.347 ; 905.47,1192.595 905.564,1191.158 ; 905.564,1191.158 cw(c904.313,1191.378) 903.063,1191.599 903.316,1193.036 cw(c904.567,1192.816) 905.817,1192.595 ; 906.232,1178.752 906.326,1177.315 ; 906.326,1177.315 cw(c905.075,1177.535) 903.825,1177.756 904.078,1179.193 cw(c905.329,1178.973) 906.579,1178.752 ; 906.393,1335.825 906.393,1338.025 ; 906.647,1329.153 906.647,1330.981 ; 906.901,1315.378 906.901,1317.578 ; 907.155,1308.706 907.155,1310.534 ; 907.155,1321.982 907.155,1324.182 ; 907.186,1242.263 907.561,1241.213 cw(c906.648,1242.095) 905.734,1242.977 906.749,1244.027 cw(c907.662,1243.145) 908.576,1242.263 ; 907.186,1307.824 905.359,1309.589 907.124,1311.416 908.951,1309.651 ; 907.366,1249.475 907.636,1248.211 cw(c906.536,1248.846) 905.436,1249.481 906.166,1250.745 cw(c907.266,1250.11) 908.366,1249.475 ; 907.366,1314.743 905.166,1316.013 906.436,1318.213 908.636,1316.943 ; 907.658,1211.658 907.928,1212.922 cw(c909.028,1213.557) 910.128,1214.192 910.858,1212.928 cw(c909.758,1212.293) 908.658,1211.658 ; 907.663,1301.535 907.663,1303.735 ; 907.851,1204.66 908.226,1205.71 cw(c909.14,1206.592) 910.053,1207.474 ; 908.128,1235.632 908.398,1234.368 cw(c907.298,1235.003) 906.198,1235.638 906.928,1236.902 cw(c908.028,1236.267) 909.128,1235.632 ; 908.128,1300.9 905.928,1302.17 907.198,1304.37 909.398,1303.1 ; 908.42,1197.815 908.69,1199.079 cw(c909.79,1199.714) 910.89,1200.349 911.62,1199.085 cw(c910.52,1198.45) 909.42,1197.815 ; 909.241,1204.66 ccw(c910.154,1205.542) 911.068,1206.424 910.053,1207.474 ; 909.811,1268.356 910.224,1269.294 cw(c911.041,1270.267) 911.857,1271.24 912.976,1270.302 ; 909.811,1336.642 911.444,1338.587 913.389,1336.954 911.756,1335.009 ; 910.156,1261.478 910.641,1262.119 cw(c911.198,1263.26) 911.755,1264.401 913.067,1263.761 cw(c912.51,1262.62) 911.953,1261.478 ; 910.156,1329.355 911.269,1331.638 913.552,1330.525 912.439,1328.242 ; 910.186,1185.263 910.561,1184.213 ; 910.366,1192.475 910.636,1191.211 cw(c909.536,1191.846) 908.436,1192.481 909.166,1193.745 cw(c910.266,1193.11) 911.366,1192.475 ; 910.561,1184.213 cw(c909.648,1185.095) 908.734,1185.977 909.749,1187.027 cw(c910.662,1186.145) 911.576,1185.263 ; 910.573,1254.513 910.986,1255.451 cw(c911.803,1256.424) 912.619,1257.397 913.738,1256.459 ; 910.573,1322.799 912.206,1324.744 914.151,1323.111 912.518,1321.166 ; 910.732,1249.855 911.851,1250.793 cw(c912.667,1249.82) 913.484,1248.847 ; 910.732,1249.855 ccw(c911.549,1248.882) 912.365,1247.909 911.952,1248.847 ; 911.128,1178.632 911.398,1177.368 cw(c910.298,1178.003) 909.198,1178.638 909.928,1179.902 cw(c911.028,1179.267) 912.128,1178.632 ; 911.343,1268.356 ccw(c912.159,1269.329) 912.976,1270.302 ; 911.494,1236.012 912.613,1236.95 cw(c913.429,1235.977) 914.246,1235.004 ; 911.494,1236.012 ccw(c912.311,1235.039) 913.127,1234.066 912.714,1235.004 ; 911.6,1335.982 911.6,1337.614 ; 911.777,1241.672 912.263,1241.031 cw(c911.706,1242.173) 911.149,1243.314 912.461,1243.955 cw(c913.018,1242.813) 913.575,1241.672 ; 911.777,1307.795 910.664,1310.078 912.947,1311.191 914.06,1308.908 ; 911.854,1329.383 911.854,1330.497 ; 911.952,1314.562 910.319,1316.507 912.264,1318.14 913.897,1316.195 ; 912.105,1254.513 ccw(c912.921,1255.486) 913.738,1256.459 ; 912.108,1315.535 912.108,1317.167 ; 912.362,1308.936 912.362,1310.05 ; 912.362,1322.139 912.362,1323.771 ; 912.714,1300.719 911.081,1302.664 913.026,1304.297 914.659,1302.352 ; 912.811,1211.356 913.224,1212.294 ; 912.87,1301.692 912.87,1303.324 ; 913.156,1204.478 913.641,1205.119 cw(c914.198,1206.26) 914.755,1207.401 916.067,1206.761 ; 913.224,1212.294 cw(c914.041,1213.267) 914.857,1214.24 915.976,1213.302 cw(c915.159,1212.329) 914.343,1211.356 ; 913.573,1197.513 913.986,1198.451 ; 913.986,1198.451 cw(c914.803,1199.424) 915.619,1200.397 916.738,1199.459 cw(c915.921,1198.486) 915.105,1197.513 ; 914.777,1184.672 915.263,1184.031 cw(c914.706,1185.173) 914.149,1186.314 915.461,1186.955 cw(c916.018,1185.813) 916.575,1184.672 ; 914.952,1191.847 915.365,1190.909 cw(c914.549,1191.882) 913.732,1192.855 914.851,1193.793 cw(c915.667,1192.82) 916.484,1191.847 ; 914.953,1204.478 ccw(c915.51,1205.62) 916.067,1206.761 ; 915.306,1268.482 915.814,1268.981 cw(c916.248,1270.175) 916.682,1271.368 918.054,1270.869 cw(c917.62,1269.675) 917.186,1268.482 ; 915.306,1336.166 916.175,1338.553 918.562,1337.684 917.693,1335.297 ; 915.714,1178.004 916.127,1177.066 cw(c915.311,1178.039) 914.494,1179.012 915.613,1179.95 cw(c916.429,1178.977) 917.246,1178.004 ; 915.792,1261.728 916.329,1261.88 ; 915.792,1328.937 916.058,1331.463 918.584,1331.197 918.318,1328.671 ; 916.068,1254.639 916.576,1255.138 cw(c917.01,1256.332) 917.444,1257.525 918.816,1257.026 ; 916.068,1322.323 916.937,1324.71 919.324,1323.841 918.455,1321.454 ; 916.329,1261.88 cw(c916.462,1263.143) 916.595,1264.406 918.047,1264.254 cw(c917.914,1262.991) 917.781,1261.728 ; 916.566,1241.433 917.103,1241.281 cw(c916.97,1242.544) 916.837,1243.807 918.289,1243.959 cw(c918.422,1242.696) 918.555,1241.433 ; 916.566,1308.224 916.3,1310.75 918.826,1311.016 919.092,1308.49 ; 916.683,1248.534 917.19,1248.035 cw(c916.756,1249.228) 916.322,1250.422 917.694,1250.921 cw(c918.128,1249.728) 918.562,1248.534 ; 916.683,1314.85 915.814,1317.237 918.201,1318.106 919.07,1315.719 ; 916.934,1336.491 916.934,1337.359 ; 917.188,1329.934 917.188,1330.2 ; 917.442,1316.044 917.442,1316.912 ; 917.445,1234.691 917.952,1234.192 cw(c917.518,1235.385) 917.084,1236.579 918.456,1237.078 cw(c918.89,1235.885) 919.324,1234.691 ; 917.445,1301.007 916.576,1303.394 918.963,1304.263 919.832,1301.876 ; 917.696,1309.487 917.696,1309.753 ; 917.696,1322.648 917.696,1323.516 ; 917.948,1254.639 ccw(c918.382,1255.832) 918.816,1257.026 ; 918.204,1302.201 918.204,1303.069 ; 918.306,1211.482 918.814,1211.981 cw(c919.248,1213.175) 919.682,1214.368 921.054,1213.869 cw(c920.62,1212.675) 920.186,1211.482 ; 918.792,1204.728 919.329,1204.88 cw(c919.462,1206.143) 919.595,1207.406 921.047,1207.254 ; 919.068,1197.639 919.576,1198.138 cw(c920.01,1199.332) 920.444,1200.525 921.816,1200.026 cw(c921.382,1198.832) 920.948,1197.639 ; 919.566,1184.433 920.103,1184.281 cw(c919.97,1185.544) 919.837,1186.807 ; 919.683,1191.534 920.19,1191.035 cw(c919.756,1192.228) 919.322,1193.422 920.694,1193.921 cw(c921.128,1192.728) 921.562,1191.534 ; 919.837,1186.807 921.289,1186.959 cw(c921.422,1185.696) 921.555,1184.433 ; 920.445,1177.691 920.952,1177.192 cw(c920.518,1178.385) 920.084,1179.579 921.456,1180.078 cw(c921.89,1178.885) 922.324,1177.691 ; 920.781,1204.728 ccw(c920.914,1205.991) 921.047,1207.254 ; 921.633,1268.528 922.173,1268.528 cw(c922.173,1269.798) 922.173,1271.068 923.633,1271.068 cw(c923.633,1269.798) 923.633,1268.528 ; 921.633,1335.528 921.633,1338.068 924.173,1338.068 924.173,1335.528 ; 922.126,1241.084 922.649,1241.437 cw(c922.957,1242.67) 923.264,1243.902 924.681,1243.549 cw(c924.373,1242.316) 924.066,1241.084 ; 922.126,1308.568 922.74,1311.032 925.204,1310.418 924.59,1307.954 ; 922.141,1248.081 922.681,1248.081 cw(c922.681,1249.351) 922.681,1250.621 924.141,1250.621 cw(c924.141,1249.351) 924.141,1248.081 ; 922.141,1315.081 922.141,1317.621 924.681,1317.621 924.681,1315.081 ; 922.232,1261.884 922.756,1261.531 cw(c922.449,1262.763) 922.141,1263.996 923.558,1264.349 cw(c923.865,1263.117) 924.173,1261.884 ; 922.232,1328.401 921.618,1330.865 924.082,1331.479 924.696,1329.015 ; 922.395,1254.685 922.935,1254.685 cw(c922.935,1255.955) 922.935,1257.225 924.395,1257.225 cw(c924.395,1255.955) 924.395,1254.685 ; 922.395,1321.685 922.395,1324.225 924.935,1324.225 924.935,1321.685 ; 922.903,1234.238 923.443,1234.238 cw(c923.443,1235.508) 923.443,1236.778 924.903,1236.778 cw(c924.903,1235.508) 924.903,1234.238 ; 922.903,1301.238 922.903,1303.778 925.443,1303.778 925.443,1301.238 ; 923.157,1329.633 923.157,1330.247 ; 923.665,1309.186 923.665,1309.8 ; 924.633,1211.528 925.173,1211.528 cw(c925.173,1212.798) 925.173,1214.068 926.633,1214.068 cw(c926.633,1212.798) 926.633,1211.528 ; 925.126,1184.084 925.649,1184.437 cw(c925.957,1185.67) 926.264,1186.902 927.681,1186.549 cw(c927.373,1185.316) 927.066,1184.084 ; 925.141,1191.081 925.681,1191.081 cw(c925.681,1192.351) 925.681,1193.621 927.141,1193.621 cw(c927.141,1192.351) 927.141,1191.081 ; 925.232,1204.884 925.756,1204.531 cw(c925.449,1205.763) 925.141,1206.996 926.558,1207.349 cw(c926.865,1206.117) 927.173,1204.884 ; 925.395,1197.685 925.935,1197.685 cw(c925.935,1198.955) 925.935,1200.225 927.395,1200.225 cw(c927.395,1198.955) 927.395,1197.685 ; 925.903,1177.238 926.443,1177.238 cw(c926.443,1178.508) 926.443,1179.778 927.903,1179.778 cw(c927.903,1178.508) 927.903,1177.238 ; 940.584,1335.632 942.738,1334.286 944.084,1336.44 941.93,1337.786 ; 940.838,1328.774 942.992,1327.428 944.338,1329.582 942.184,1330.928 ; 940.87,1269.09 ccw(c941.947,1268.417) 943.024,1267.744 943.798,1268.982 ccw(c942.721,1269.655) 941.644,1270.328 941.93,1269.09 ; 941.092,1315.185 943.246,1313.839 944.592,1315.993 942.438,1317.339 ; 941.124,1262.232 ccw(c942.201,1261.559) 943.278,1260.886 944.052,1262.124 ccw(c942.975,1262.797) 941.898,1263.47 942.184,1262.232 ; 941.346,1308.327 943.5,1306.981 944.846,1309.135 942.692,1310.481 ; 941.346,1321.789 943.5,1320.443 944.846,1322.597 942.692,1323.943 ; 941.378,1248.643 ccw(c942.455,1247.97) 943.532,1247.297 944.306,1248.535 ccw(c943.229,1249.208) 942.152,1249.881 942.438,1248.643 ; 941.632,1241.785 ccw(c942.709,1241.112) 943.786,1240.439 944.56,1241.677 ccw(c943.483,1242.35) 942.406,1243.023 942.692,1241.785 ; 941.632,1255.247 ccw(c942.709,1254.574) 943.786,1253.901 944.56,1255.139 ccw(c943.483,1255.812) 942.406,1256.485 942.692,1255.247 ; 941.854,1301.342 944.008,1299.996 945.354,1302.15 943.2,1303.496 ; 942.14,1234.8 ccw(c943.217,1234.127) 944.294,1233.454 945.068,1234.692 ccw(c943.991,1235.365) 942.914,1236.038 943.2,1234.8 ; 942.334,1334.959 942.334,1337.113 ; 942.588,1328.101 942.588,1330.255 ; 942.842,1314.512 942.842,1316.666 ; 943.096,1307.654 943.096,1309.808 ; 943.096,1321.116 943.096,1323.27 ; 943.604,1300.669 943.604,1302.823 ; 943.87,1212.09 ccw(c944.947,1211.417) 946.024,1210.744 946.798,1211.982 ccw(c945.721,1212.655) 944.644,1213.328 944.93,1212.09